# Altium PCB board.PcbDoc (part 2 of 3)
Units mil, origin at the board's own origin, x right, y up, seen from the top; angles counter-clockwise.
Board outline 2246 x 2100 mil, 2 copper layers (Top Layer, Bottom Layer); 47 components, 39 nets, 150 pads, 7 vias.
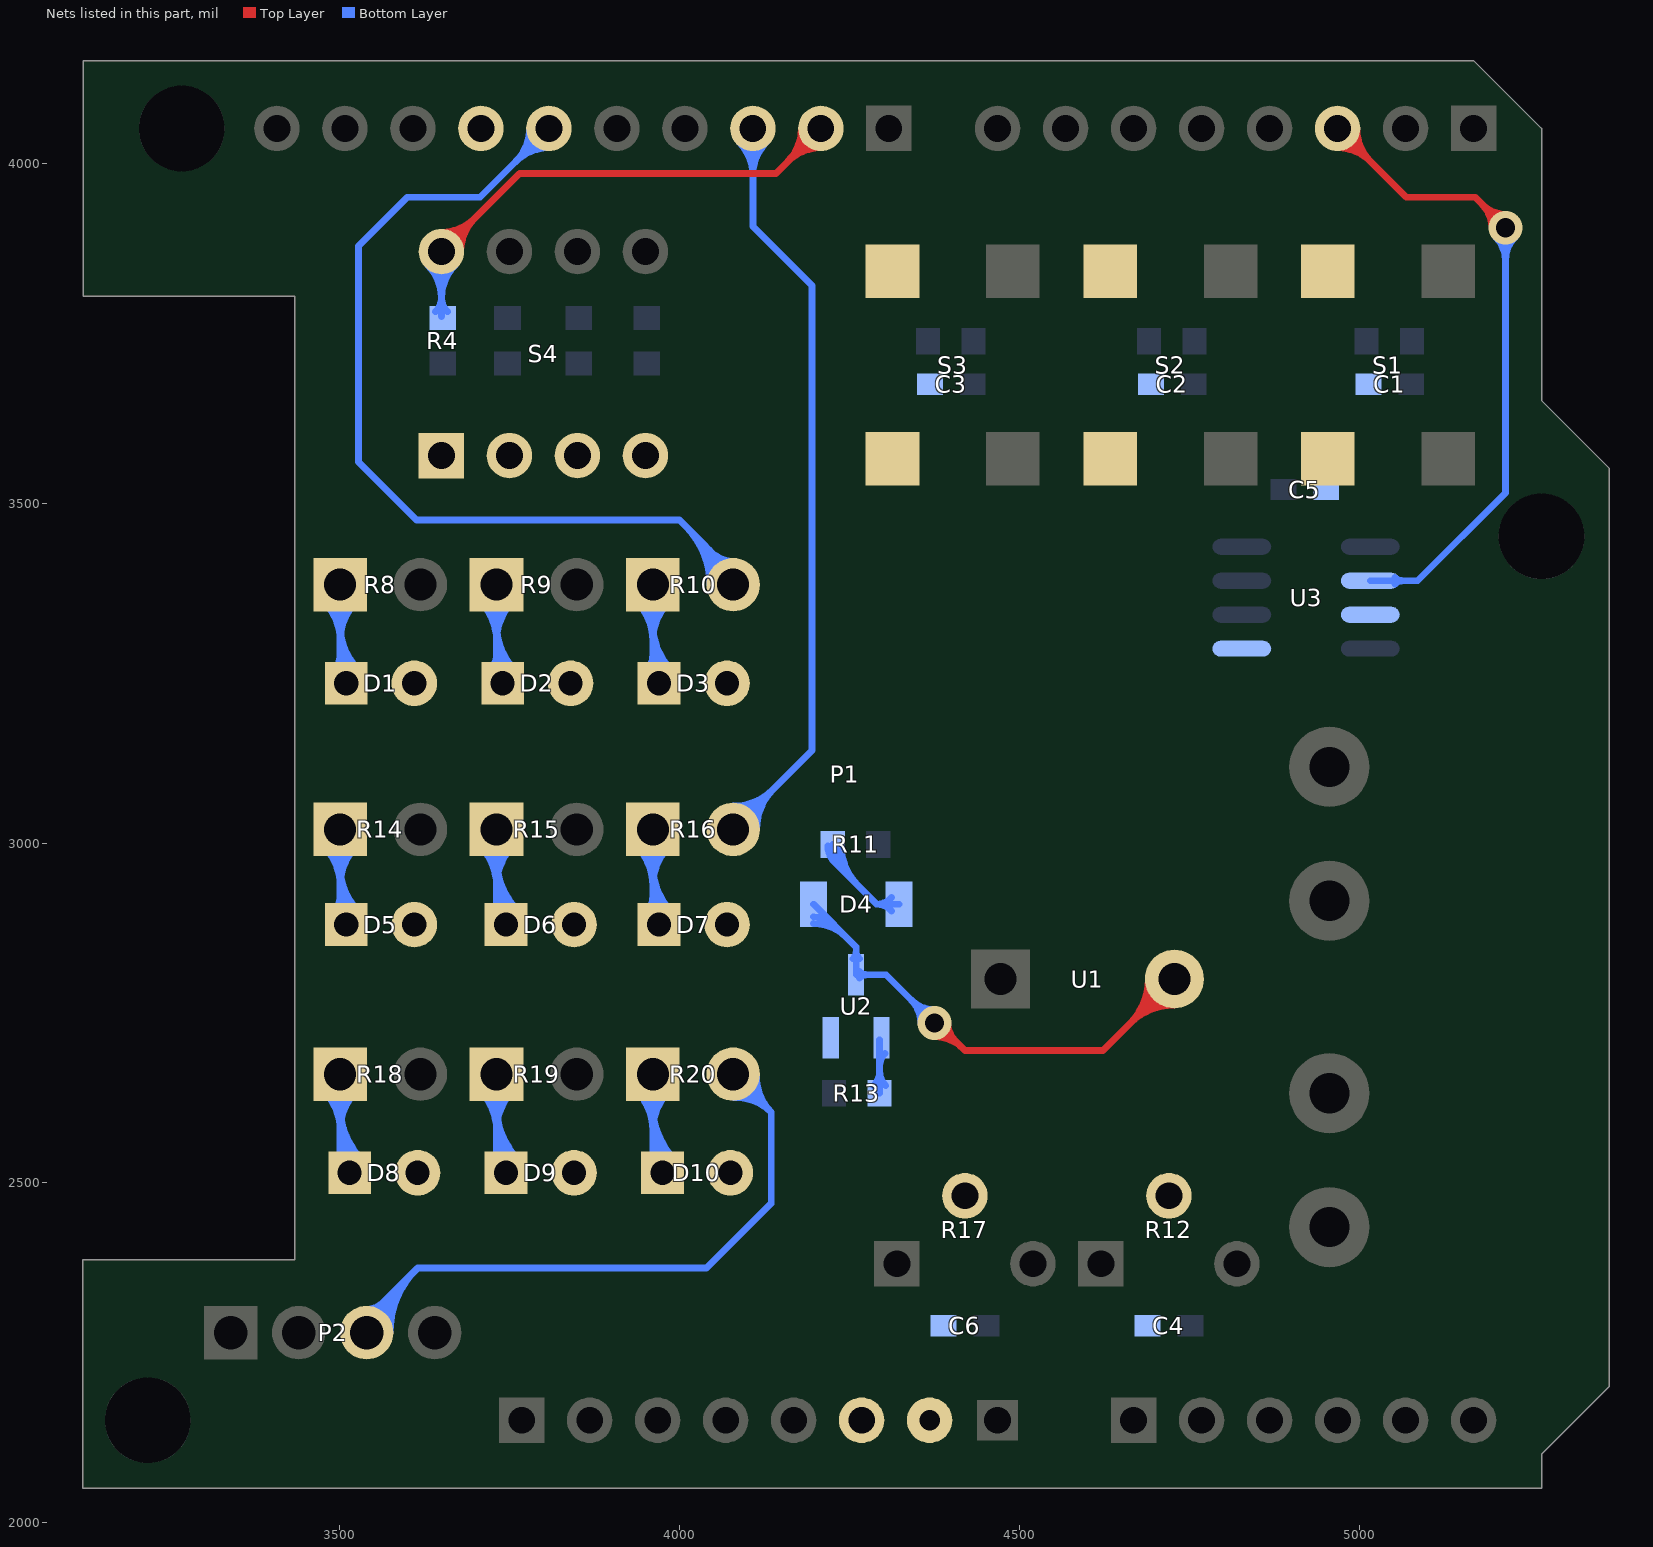
[diagram p2: the nets of this part, all layers, seen from the top]

## Via types
v1: diameter 50, hole 28, Top Layer to Bottom Layer, 7 vias

## Nets (pads, with @x,y where several pads share a name; then routed paths per layer and width w, separated by ;. In a path a pad name is that pad's centre, name@x,y a point inside that pad or via, vN(x,y) a via of type N, cw(c..) or ccw(c..) an arc to the next point about the centre after c; other vN are vias at no path point) (continued)
DIPSW4: P1.24 R4.2 S4.8 | length 3639.1
  Top Layer w10: S4.8@3650,3870 3765,3985 4142,3985 P1.24@4208,4051 ; S4.8@3650,3888.46 ccw(c3650,3933.04) 3681.52,3901.52 ; S4.8@3650,3888.46 ccw(c3650,3933.04) 3681.52,3901.52 ; S4.8@3650,3888.46 ccw(c3650,3933.04) 3681.52,3901.52 ; S4.8@3650,3888.46 ccw(c3650,3933.04) 3681.52,3901.52 ; S4.8@3650,3888.46 ccw(c3650,3933.04) 3681.52,3901.52 ; S4.8@3650,3898.46 ccw(c3650,3967.18) 3698.59,3918.59 ; S4.8@3650,3898.46 ccw(c3650,3967.18) 3698.59,3918.59 ; S4.8@3650,3898.46 ccw(c3650,3967.18) 3698.59,3918.59 ; S4.8@3650,3898.46 ccw(c3650,3967.18) 3698.59,3918.59 ; S4.8@3650,3898.46 ccw(c3650,3967.18) 3698.59,3918.59 ; S4.8@3668.46,3870 cw(c3713.04,3870) 3681.52,3901.52 ; S4.8@3668.46,3870 cw(c3713.04,3870) 3681.52,3901.52 ; S4.8@3668.46,3870 cw(c3713.04,3870) 3681.52,3901.52 ; S4.8@3668.46,3870 cw(c3713.04,3870) 3681.52,3901.52 ; S4.8@3668.46,3870 cw(c3713.04,3870) 3681.52,3901.52 ; S4.8@3678.46,3870 cw(c3747.18,3870) 3698.59,3918.59 ; S4.8@3678.46,3870 cw(c3747.18,3870) 3698.59,3918.59 ; S4.8@3678.46,3870 cw(c3747.18,3870) 3698.59,3918.59 ; S4.8@3678.46,3870 cw(c3747.18,3870) 3698.59,3918.59 ; S4.8@3678.46,3870 cw(c3747.18,3870) 3698.59,3918.59 ; 4159.41,4002.41 cw(c4208,3953.82) P1.24@4208,4022.54 ; 4159.41,4002.41 ccw(c4110.82,4051) P1.24@4179.54,4051 ; 4159.41,4002.41 cw(c4208,3953.82) P1.24@4208,4022.54 ; 4159.41,4002.41 ccw(c4110.82,4051) P1.24@4179.54,4051 ; 4159.41,4002.41 ccw(c4110.82,4051) P1.24@4179.54,4051 ; 4159.41,4002.41 cw(c4208,3953.82) P1.24@4208,4022.54 ; 4159.41,4002.41 ccw(c4110.82,4051) P1.24@4179.54,4051 ; 4159.41,4002.41 cw(c4208,3953.82) P1.24@4208,4022.54 ; 4159.41,4002.41 ccw(c4110.82,4051) P1.24@4179.54,4051 ; 4159.41,4002.41 cw(c4208,3953.82) P1.24@4208,4022.54 ; 4176.48,4019.48 cw(c4208,3987.96) P1.24@4208,4032.54 ; 4176.48,4019.48 ccw(c4144.96,4051) P1.24@4189.54,4051 ; 4176.48,4019.48 cw(c4208,3987.96) P1.24@4208,4032.54 ; 4176.48,4019.48 ccw(c4144.96,4051) P1.24@4189.54,4051 ; 4176.48,4019.48 ccw(c4144.96,4051) P1.24@4189.54,4051 ; 4176.48,4019.48 cw(c4208,3987.96) P1.24@4208,4032.54 ; 4176.48,4019.48 ccw(c4144.96,4051) P1.24@4189.54,4051 ; 4176.48,4019.48 cw(c4208,3987.96) P1.24@4208,4032.54 ; 4176.48,4019.48 ccw(c4144.96,4051) P1.24@4189.54,4051 ; 4176.48,4019.48 cw(c4208,3987.96) P1.24@4208,4032.54
  Bottom Layer w10: R4.2@3650,3774.46 S4.8@3650,3870 ; S4.8@3629.87,3849.87 cw(c3581.28,3801.28) 3650,3801.28 ; S4.8@3629.87,3849.87 cw(c3581.28,3801.28) 3650,3801.28 ; S4.8@3629.87,3849.87 cw(c3581.28,3801.28) 3650,3801.28 ; S4.8@3629.87,3849.87 cw(c3581.28,3801.28) 3650,3801.28 ; S4.8@3629.87,3849.87 cw(c3581.28,3801.28) 3650,3801.28 ; S4.8@3636.94,3856.94 cw(c3605.42,3825.42) 3650,3825.42 ; S4.8@3636.94,3856.94 cw(c3605.42,3825.42) 3650,3825.42 ; S4.8@3636.94,3856.94 cw(c3605.42,3825.42) 3650,3825.42 ; S4.8@3636.94,3856.94 cw(c3605.42,3825.42) 3650,3825.42 ; S4.8@3636.94,3856.94 cw(c3605.42,3825.42) 3650,3825.42 ; R4.2@3641.04,3781.46 ccw(c3619.41,3803.09) 3650,3803.09 ; R4.2@3641.04,3781.46 ccw(c3619.41,3803.09) 3650,3803.09 ; R4.2@3641.04,3781.46 ccw(c3619.41,3803.09) 3650,3803.09 ; R4.2@3641.04,3781.46 ccw(c3619.41,3803.09) 3650,3803.09 ; R4.2@3641.04,3781.46 ccw(c3619.41,3803.09) 3650,3803.09 ; 3650,3801.28 cw(c3718.72,3801.28) S4.8@3670.13,3849.87 ; 3650,3801.28 cw(c3718.72,3801.28) S4.8@3670.13,3849.87 ; 3650,3801.28 cw(c3718.72,3801.28) S4.8@3670.13,3849.87 ; 3650,3801.28 cw(c3718.72,3801.28) S4.8@3670.13,3849.87 ; 3650,3801.28 cw(c3718.72,3801.28) S4.8@3670.13,3849.87 ; 3650,3803.24 ccw(c3680.81,3803.24) R4.2@3659.02,3781.46 ; 3650,3803.24 ccw(c3680.81,3803.24) R4.2@3659.02,3781.46 ; 3650,3803.24 ccw(c3680.81,3803.24) R4.2@3659.02,3781.46 ; 3650,3803.24 ccw(c3680.81,3803.24) R4.2@3659.02,3781.46 ; 3650,3803.24 ccw(c3680.81,3803.24) R4.2@3659.02,3781.46 ; 3650,3825.42 cw(c3694.58,3825.42) S4.8@3663.06,3856.94 ; 3650,3825.42 cw(c3694.58,3825.42) S4.8@3663.06,3856.94 ; 3650,3825.42 cw(c3694.58,3825.42) S4.8@3663.06,3856.94 ; 3650,3825.42 cw(c3694.58,3825.42) S4.8@3663.06,3856.94 ; 3650,3825.42 cw(c3694.58,3825.42) S4.8@3663.06,3856.94
DIR_485: P1.17 U3.2 U3.3 | length 2727.2
  Top Layer w10: P1.17@4968,4051 5069,3950 5170,3950 v1(5215,3905) ; P1.17@4968,4022.54 cw(c4968,3953.82) 5016.59,4002.41 ; P1.17@4968,4022.54 cw(c4968,3953.82) 5016.59,4002.41 ; P1.17@4968,4022.54 cw(c4968,3953.82) 5016.59,4002.41 ; P1.17@4968,4022.54 cw(c4968,3953.82) 5016.59,4002.41 ; P1.17@4968,4022.54 cw(c4968,3953.82) 5016.59,4002.41 ; P1.17@4968,4032.54 cw(c4968,3987.96) 4999.52,4019.48 ; P1.17@4968,4032.54 cw(c4968,3987.96) 4999.52,4019.48 ; P1.17@4968,4032.54 cw(c4968,3987.96) 4999.52,4019.48 ; P1.17@4968,4032.54 cw(c4968,3987.96) 4999.52,4019.48 ; P1.17@4968,4032.54 cw(c4968,3987.96) 4999.52,4019.48 ; P1.17@4986.46,4051 ccw(c5031.04,4051) 4999.52,4019.48 ; P1.17@4986.46,4051 ccw(c5031.04,4051) 4999.52,4019.48 ; P1.17@4986.46,4051 ccw(c5031.04,4051) 4999.52,4019.48 ; P1.17@4986.46,4051 ccw(c5031.04,4051) 4999.52,4019.48 ; P1.17@4986.46,4051 ccw(c5031.04,4051) 4999.52,4019.48 ; P1.17@4996.46,4051 ccw(c5065.18,4051) 5016.59,4002.41 ; P1.17@4996.46,4051 ccw(c5065.18,4051) 5016.59,4002.41 ; P1.17@4996.46,4051 ccw(c5065.18,4051) 5016.59,4002.41 ; P1.17@4996.46,4051 ccw(c5065.18,4051) 5016.59,4002.41 ; P1.17@4996.46,4051 ccw(c5065.18,4051) 5016.59,4002.41 ; 5180.86,3939.14 cw(c5146.72,3905) v1@5195,3905 ; 5180.86,3939.14 ccw(c5215,3973.28) v1@5215,3925 ; 5180.86,3939.14 cw(c5146.72,3905) v1@5195,3905 ; 5180.86,3939.14 ccw(c5215,3973.28) v1@5215,3925 ; 5180.86,3939.14 ccw(c5215,3973.28) v1@5215,3925 ; 5180.86,3939.14 cw(c5146.72,3905) v1@5195,3905 ; 5180.86,3939.14 ccw(c5215,3973.28) v1@5215,3925 ; 5180.86,3939.14 cw(c5146.72,3905) v1@5195,3905 ; 5180.86,3939.14 ccw(c5215,3973.28) v1@5215,3925 ; 5180.86,3939.14 cw(c5146.72,3905) v1@5195,3905
  Bottom Layer w10: U3.2@5016.19,3385.81 5085.81,3385.81 5215,3515 v1(5215,3905) ; U3.2@5052.51,3381 cw(c5064.13,3369.37) 5064.13,3385.81 ; U3.2@5052.51,3381 cw(c5064.13,3369.37) 5064.13,3385.81 ; U3.2@5052.51,3381 cw(c5064.13,3369.37) 5064.13,3385.81 ; U3.2@5052.51,3381 cw(c5064.13,3369.37) 5064.13,3385.81 ; U3.2@5052.51,3381 cw(c5064.13,3369.37) 5064.13,3385.81 ; U3.2@5052.51,3390.63 ccw(c5064.13,3402.26) 5064.13,3385.81 ; U3.2@5052.51,3390.63 ccw(c5064.13,3402.26) 5064.13,3385.81 ; U3.2@5052.51,3390.63 ccw(c5064.13,3402.26) 5064.13,3385.81 ; U3.2@5052.51,3390.63 ccw(c5064.13,3402.26) 5064.13,3385.81 ; U3.2@5052.51,3390.63 ccw(c5064.13,3402.26) 5064.13,3385.81 ; v1@5200.86,3890.86 cw(c5166.72,3856.72) 5215,3856.72 ; v1@5200.86,3890.86 cw(c5166.72,3856.72) 5215,3856.72 ; v1@5200.86,3890.86 cw(c5166.72,3856.72) 5215,3856.72 ; v1@5200.86,3890.86 cw(c5166.72,3856.72) 5215,3856.72 ; v1@5200.86,3890.86 cw(c5166.72,3856.72) 5215,3856.72 ; 5215,3856.72 cw(c5263.28,3856.72) v1@5229.14,3890.86 ; 5215,3856.72 cw(c5263.28,3856.72) v1@5229.14,3890.86 ; 5215,3856.72 cw(c5263.28,3856.72) v1@5229.14,3890.86 ; 5215,3856.72 cw(c5263.28,3856.72) v1@5229.14,3890.86 ; 5215,3856.72 cw(c5263.28,3856.72) v1@5229.14,3890.86
GND: C1.1 C2.1 C3.1 C4.1 C5.1 C6.1 D1.2 D2.2 D3.2 D5.2 D6.2 D7.2 D8.2 D9.2 D10.2 P1.6 P1.7 P1.29 R12.2 R17.2 S1.1 S1.2 S2.1 S2.2 S3.1 S3.2 S4.1 S4.2 S4.3 S4.4 U2.2 U3.5
GREEN1: P1.28 R10.2 | length 3708.2
  Bottom Layer w10: P1.28@3808,4051 3707,3950 3600,3950 3528,3878 3528,3560.28 3613.28,3475 4000,3475 4079.06,3395.94 R10.2@4079.06,3380 ; 3759.41,4002.41 cw(c3808,3953.82) P1.28@3808,4022.54 ; 3759.41,4002.41 ccw(c3710.82,4051) P1.28@3779.54,4051 ; 3759.41,4002.41 cw(c3808,3953.82) P1.28@3808,4022.54 ; 3759.41,4002.41 ccw(c3710.82,4051) P1.28@3779.54,4051 ; 3759.41,4002.41 ccw(c3710.82,4051) P1.28@3779.54,4051 ; 3759.41,4002.41 cw(c3808,3953.82) P1.28@3808,4022.54 ; 3759.41,4002.41 ccw(c3710.82,4051) P1.28@3779.54,4051 ; 3759.41,4002.41 cw(c3808,3953.82) P1.28@3808,4022.54 ; 3759.41,4002.41 ccw(c3710.82,4051) P1.28@3779.54,4051 ; 3759.41,4002.41 cw(c3808,3953.82) P1.28@3808,4022.54 ; 3776.48,4019.48 cw(c3808,3987.96) P1.28@3808,4032.54 ; 3776.48,4019.48 ccw(c3744.96,4051) P1.28@3789.54,4051 ; 3776.48,4019.48 cw(c3808,3987.96) P1.28@3808,4032.54 ; 3776.48,4019.48 ccw(c3744.96,4051) P1.28@3789.54,4051 ; 3776.48,4019.48 ccw(c3744.96,4051) P1.28@3789.54,4051 ; 3776.48,4019.48 cw(c3808,3987.96) P1.28@3808,4032.54 ; 3776.48,4019.48 ccw(c3744.96,4051) P1.28@3789.54,4051 ; 3776.48,4019.48 cw(c3808,3987.96) P1.28@3808,4032.54 ; 3776.48,4019.48 ccw(c3744.96,4051) P1.28@3789.54,4051 ; 3776.48,4019.48 cw(c3808,3987.96) P1.28@3808,4032.54 ; 4009.11,3465.89 cw(c3923.21,3380) R10.2@4044.68,3380 ; 4009.11,3465.89 cw(c3923.21,3380) R10.2@4044.68,3380 ; 4009.11,3465.89 cw(c3923.21,3380) R10.2@4044.68,3380 ; 4009.11,3465.89 cw(c3923.21,3380) R10.2@4044.68,3380 ; 4009.11,3465.89 cw(c3923.21,3380) R10.2@4044.68,3380 ; 4026.18,3448.82 cw(c3957.36,3380) R10.2@4054.69,3380 ; 4026.18,3448.82 cw(c3957.36,3380) R10.2@4054.69,3380 ; 4026.18,3448.82 cw(c3957.36,3380) R10.2@4054.69,3380 ; 4026.18,3448.82 cw(c3957.36,3380) R10.2@4054.69,3380 ; 4026.18,3448.82 cw(c3957.36,3380) R10.2@4054.69,3380 ; 4043.25,3431.75 cw(c3991.5,3380) R10.2@4064.68,3380 ; 4043.25,3431.75 cw(c3991.5,3380) R10.2@4064.68,3380 ; 4043.25,3431.75 cw(c3991.5,3380) R10.2@4064.68,3380 ; 4043.25,3431.75 cw(c3991.5,3380) R10.2@4064.68,3380 ; 4043.25,3431.75 cw(c3991.5,3380) R10.2@4064.68,3380 ; 4047.6,3427.4 ccw(c4079.06,3458.85) R10.2@4079.06,3414.37 ; 4047.6,3427.4 ccw(c4079.06,3458.85) R10.2@4079.06,3414.37 ; 4047.6,3427.4 ccw(c4079.06,3458.85) R10.2@4079.06,3414.37 ; 4047.6,3427.4 ccw(c4079.06,3458.85) R10.2@4079.06,3414.37 ; 4047.6,3427.4 ccw(c4079.06,3458.85) R10.2@4079.06,3414.37 ; 4060.32,3414.68 cw(c4025.64,3380) R10.2@4074.68,3380 ; 4060.32,3414.68 cw(c4025.64,3380) R10.2@4074.68,3380 ; 4060.32,3414.68 cw(c4025.64,3380) R10.2@4074.68,3380 ; 4060.32,3414.68 cw(c4025.64,3380) R10.2@4074.68,3380 ; 4060.32,3414.68 cw(c4025.64,3380) R10.2@4074.68,3380
GREEN2: P1.25 R16.2 | length 3118.7
  Bottom Layer w10: R16.2@4079.06,3020 4195,3135.94 4195,3820 4108,3907 P1.25@4108,4051 ; R16.2@4079.06,3044.37 ccw(c4079.06,3103.2) 4120.66,3061.6 ; R16.2@4079.06,3044.37 ccw(c4079.06,3103.2) 4120.66,3061.6 ; R16.2@4079.06,3044.37 ccw(c4079.06,3103.2) 4120.66,3061.6 ; R16.2@4079.06,3044.37 ccw(c4079.06,3103.2) 4120.66,3061.6 ; R16.2@4079.06,3044.37 ccw(c4079.06,3103.2) 4120.66,3061.6 ; R16.2@4079.06,3054.37 ccw(c4079.06,3137.35) 4137.73,3078.67 ; R16.2@4079.06,3054.37 ccw(c4079.06,3137.35) 4137.73,3078.67 ; R16.2@4079.06,3054.37 ccw(c4079.06,3137.35) 4137.73,3078.67 ; R16.2@4079.06,3054.37 ccw(c4079.06,3137.35) 4137.73,3078.67 ; R16.2@4079.06,3054.37 ccw(c4079.06,3137.35) 4137.73,3078.67 ; P1.25@4087.87,4030.87 cw(c4039.28,3982.28) 4108,3982.28 ; P1.25@4087.87,4030.87 cw(c4039.28,3982.28) 4108,3982.28 ; P1.25@4087.87,4030.87 cw(c4039.28,3982.28) 4108,3982.28 ; P1.25@4087.87,4030.87 cw(c4039.28,3982.28) 4108,3982.28 ; P1.25@4087.87,4030.87 cw(c4039.28,3982.28) 4108,3982.28 ; P1.25@4094.94,4037.94 cw(c4063.42,4006.42) 4108,4006.42 ; P1.25@4094.94,4037.94 cw(c4063.42,4006.42) 4108,4006.42 ; P1.25@4094.94,4037.94 cw(c4063.42,4006.42) 4108,4006.42 ; P1.25@4094.94,4037.94 cw(c4063.42,4006.42) 4108,4006.42 ; P1.25@4094.94,4037.94 cw(c4063.42,4006.42) 4108,4006.42 ; R16.2@4103.43,3020 cw(c4162.26,3020) 4120.66,3061.6 ; R16.2@4103.43,3020 cw(c4162.26,3020) 4120.66,3061.6 ; R16.2@4103.43,3020 cw(c4162.26,3020) 4120.66,3061.6 ; R16.2@4103.43,3020 cw(c4162.26,3020) 4120.66,3061.6 ; R16.2@4103.43,3020 cw(c4162.26,3020) 4120.66,3061.6 ; 4108,3982.28 cw(c4176.72,3982.28) P1.25@4128.13,4030.87 ; 4108,3982.28 cw(c4176.72,3982.28) P1.25@4128.13,4030.87 ; 4108,3982.28 cw(c4176.72,3982.28) P1.25@4128.13,4030.87 ; 4108,3982.28 cw(c4176.72,3982.28) P1.25@4128.13,4030.87 ; 4108,3982.28 cw(c4176.72,3982.28) P1.25@4128.13,4030.87 ; 4108,4006.42 cw(c4152.58,4006.42) P1.25@4121.06,4037.94 ; 4108,4006.42 cw(c4152.58,4006.42) P1.25@4121.06,4037.94 ; 4108,4006.42 cw(c4152.58,4006.42) P1.25@4121.06,4037.94 ; 4108,4006.42 cw(c4152.58,4006.42) P1.25@4121.06,4037.94 ; 4108,4006.42 cw(c4152.58,4006.42) P1.25@4121.06,4037.94 ; R16.2@4113.43,3020 cw(c4196.4,3020) 4137.73,3078.67 ; R16.2@4113.43,3020 cw(c4196.4,3020) 4137.73,3078.67 ; R16.2@4113.43,3020 cw(c4196.4,3020) 4137.73,3078.67 ; R16.2@4113.43,3020 cw(c4196.4,3020) 4137.73,3078.67 ; R16.2@4113.43,3020 cw(c4196.4,3020) 4137.73,3078.67
GREEN3: P2.3 R20.2 | length 3562.6
  Bottom Layer w10: P2.3@3540,2280 3540,2300 3615,2375 4040,2375 4135,2470 4135,2604.06 ; R20.2@4079.06,2660 4135,2604.06 ; P2.3@3540,2314.37 ccw(c3540,2349.06) 3564.53,2324.53 ; P2.3@3540,2314.37 ccw(c3540,2349.06) 3564.53,2324.53 ; P2.3@3540,2314.37 ccw(c3540,2349.06) 3564.53,2324.53 ; P2.3@3540,2314.37 ccw(c3540,2349.06) 3564.53,2324.53 ; P2.3@3540,2314.37 ccw(c3540,2349.06) 3564.53,2324.53 ; P2.3@3544.37,2280 cw(c3603.2,2280) 3561.6,2321.6 ; P2.3@3544.37,2280 cw(c3603.2,2280) 3561.6,2321.6 ; P2.3@3544.37,2280 cw(c3603.2,2280) 3561.6,2321.6 ; P2.3@3544.37,2280 cw(c3603.2,2280) 3561.6,2321.6 ; P2.3@3544.37,2280 cw(c3603.2,2280) 3561.6,2321.6 ; P2.3@3554.37,2280 cw(c3637.35,2280) 3578.67,2338.67 ; P2.3@3554.37,2280 cw(c3637.35,2280) 3578.67,2338.67 ; P2.3@3554.37,2280 cw(c3637.35,2280) 3578.67,2338.67 ; P2.3@3554.37,2280 cw(c3637.35,2280) 3578.67,2338.67 ; P2.3@3554.37,2280 cw(c3637.35,2280) 3578.67,2338.67 ; P2.3@3564.37,2280 cw(c3671.49,2280) 3595.74,2355.74 ; P2.3@3564.37,2280 cw(c3671.49,2280) 3595.74,2355.74 ; P2.3@3564.37,2280 cw(c3671.49,2280) 3595.74,2355.74 ; P2.3@3564.37,2280 cw(c3671.49,2280) 3595.74,2355.74 ; P2.3@3564.37,2280 cw(c3671.49,2280) 3595.74,2355.74 ; P2.3@3574.37,2280 cw(c3705.63,2280) 3612.82,2372.82 ; P2.3@3574.37,2280 cw(c3705.63,2280) 3612.82,2372.82 ; P2.3@3574.37,2280 cw(c3705.63,2280) 3612.82,2372.82 ; P2.3@3574.37,2280 cw(c3705.63,2280) 3612.82,2372.82 ; P2.3@3574.37,2280 cw(c3705.63,2280) 3612.82,2372.82 ; R20.2@4079.89,2635.64 cw(c4081.69,2583.3) 4118.72,2620.33 ; R20.2@4079.89,2635.64 cw(c4081.69,2583.3) 4118.72,2620.33 ; R20.2@4079.89,2635.64 cw(c4081.69,2583.3) 4118.72,2620.33 ; R20.2@4079.89,2635.64 cw(c4081.69,2583.3) 4118.72,2620.33 ; R20.2@4079.89,2635.64 cw(c4081.69,2583.3) 4118.72,2620.33 ; R20.2@4080.23,2625.65 cw(c4082.76,2551.83) 4135,2604.06 ; R20.2@4080.23,2625.65 cw(c4082.76,2551.83) 4135,2604.06 ; R20.2@4080.23,2625.65 cw(c4082.76,2551.83) 4135,2604.06 ; R20.2@4080.23,2625.65 cw(c4082.76,2551.83) 4135,2604.06 ; R20.2@4080.23,2625.65 cw(c4082.76,2551.83) 4135,2604.06 ; R20.2@4103.41,2659.16 ccw(c4155.76,2657.37) 4118.72,2620.33 ; R20.2@4103.41,2659.16 ccw(c4155.76,2657.37) 4118.72,2620.33 ; R20.2@4103.41,2659.16 ccw(c4155.76,2657.37) 4118.72,2620.33 ; R20.2@4103.41,2659.16 ccw(c4155.76,2657.37) 4118.72,2620.33 ; R20.2@4103.41,2659.16 ccw(c4155.76,2657.37) 4118.72,2620.33 ; R20.2@4113.4,2658.82 ccw(c4187.23,2656.29) 4135,2604.06 ; R20.2@4113.4,2658.82 ccw(c4187.23,2656.29) 4135,2604.06 ; R20.2@4113.4,2658.82 ccw(c4187.23,2656.29) 4135,2604.06 ; R20.2@4113.4,2658.82 ccw(c4187.23,2656.29) 4135,2604.06 ; R20.2@4113.4,2658.82 ccw(c4187.23,2656.29) 4135,2604.06
NetD1_1: D1.1 R8.1 | length 2212.9
  Bottom Layer w10: D1.1@3500.94,3244.06 R8.1@3500.94,3380 ; R8.1@3476.64,3355.7 cw(c3417.97,3297.02) 3500.94,3297.02 ; R8.1@3476.64,3355.7 cw(c3417.97,3297.02) 3500.94,3297.02 ; R8.1@3476.64,3355.7 cw(c3417.97,3297.02) 3500.94,3297.02 ; R8.1@3476.64,3355.7 cw(c3417.97,3297.02) 3500.94,3297.02 ; R8.1@3476.64,3355.7 cw(c3417.97,3297.02) 3500.94,3297.02 ; R8.1@3483.71,3362.77 cw(c3442.11,3321.17) 3500.94,3321.17 ; R8.1@3483.71,3362.77 cw(c3442.11,3321.17) 3500.94,3321.17 ; R8.1@3483.71,3362.77 cw(c3442.11,3321.17) 3500.94,3321.17 ; R8.1@3483.71,3362.77 cw(c3442.11,3321.17) 3500.94,3321.17 ; R8.1@3483.71,3362.77 cw(c3442.11,3321.17) 3500.94,3321.17 ; D1.1@3491.26,3253.74 ccw(c3467.89,3277.11) 3500.94,3277.11 ; D1.1@3491.26,3253.74 ccw(c3467.89,3277.11) 3500.94,3277.11 ; D1.1@3491.26,3253.74 ccw(c3467.89,3277.11) 3500.94,3277.11 ; D1.1@3491.26,3253.74 ccw(c3467.89,3277.11) 3500.94,3277.11 ; D1.1@3491.26,3253.74 ccw(c3467.89,3277.11) 3500.94,3277.11 ; 3500.94,3272.54 ccw(c3547.54,3272.54) D1.1@3514.59,3239.59 ; 3500.94,3272.54 ccw(c3547.54,3272.54) D1.1@3514.59,3239.59 ; 3500.94,3272.54 ccw(c3547.54,3272.54) D1.1@3514.59,3239.59 ; 3500.94,3272.54 ccw(c3547.54,3272.54) D1.1@3514.59,3239.59 ; 3500.94,3272.54 ccw(c3547.54,3272.54) D1.1@3514.59,3239.59 ; 3500.94,3296.69 ccw(c3571.69,3296.69) D1.1@3521.66,3246.66 ; 3500.94,3296.69 ccw(c3571.69,3296.69) D1.1@3521.66,3246.66 ; 3500.94,3296.69 ccw(c3571.69,3296.69) D1.1@3521.66,3246.66 ; 3500.94,3296.69 ccw(c3571.69,3296.69) D1.1@3521.66,3246.66 ; 3500.94,3296.69 ccw(c3571.69,3296.69) D1.1@3521.66,3246.66 ; 3500.94,3297.02 cw(c3583.92,3297.02) R8.1@3525.25,3355.7 ; 3500.94,3297.02 cw(c3583.92,3297.02) R8.1@3525.25,3355.7 ; 3500.94,3297.02 cw(c3583.92,3297.02) R8.1@3525.25,3355.7 ; 3500.94,3297.02 cw(c3583.92,3297.02) R8.1@3525.25,3355.7 ; 3500.94,3297.02 cw(c3583.92,3297.02) R8.1@3525.25,3355.7 ; 3500.94,3320.83 ccw(c3595.83,3320.83) D1.1@3528.74,3253.74 ; 3500.94,3320.83 ccw(c3595.83,3320.83) D1.1@3528.74,3253.74 ; 3500.94,3320.83 ccw(c3595.83,3320.83) D1.1@3528.74,3253.74 ; 3500.94,3320.83 ccw(c3595.83,3320.83) D1.1@3528.74,3253.74 ; 3500.94,3320.83 ccw(c3595.83,3320.83) D1.1@3528.74,3253.74 ; 3500.94,3321.17 cw(c3559.78,3321.17) R8.1@3518.18,3362.77 ; 3500.94,3321.17 cw(c3559.78,3321.17) R8.1@3518.18,3362.77 ; 3500.94,3321.17 cw(c3559.78,3321.17) R8.1@3518.18,3362.77 ; 3500.94,3321.17 cw(c3559.78,3321.17) R8.1@3518.18,3362.77 ; 3500.94,3321.17 cw(c3559.78,3321.17) R8.1@3518.18,3362.77
NetD2_1: D2.1 R9.1 | length 2212.9
  Bottom Layer w10: D2.1@3730.94,3244.06 R9.1@3730.94,3380 ; R9.1@3706.64,3355.7 cw(c3647.97,3297.02) 3730.94,3297.02 ; R9.1@3706.64,3355.7 cw(c3647.97,3297.02) 3730.94,3297.02 ; R9.1@3706.64,3355.7 cw(c3647.97,3297.02) 3730.94,3297.02 ; R9.1@3706.64,3355.7 cw(c3647.97,3297.02) 3730.94,3297.02 ; R9.1@3706.64,3355.7 cw(c3647.97,3297.02) 3730.94,3297.02 ; R9.1@3713.71,3362.77 cw(c3672.11,3321.17) 3730.94,3321.17 ; R9.1@3713.71,3362.77 cw(c3672.11,3321.17) 3730.94,3321.17 ; R9.1@3713.71,3362.77 cw(c3672.11,3321.17) 3730.94,3321.17 ; R9.1@3713.71,3362.77 cw(c3672.11,3321.17) 3730.94,3321.17 ; R9.1@3713.71,3362.77 cw(c3672.11,3321.17) 3730.94,3321.17 ; D2.1@3721.26,3253.74 ccw(c3697.89,3277.11) 3730.94,3277.11 ; D2.1@3721.26,3253.74 ccw(c3697.89,3277.11) 3730.94,3277.11 ; D2.1@3721.26,3253.74 ccw(c3697.89,3277.11) 3730.94,3277.11 ; D2.1@3721.26,3253.74 ccw(c3697.89,3277.11) 3730.94,3277.11 ; D2.1@3721.26,3253.74 ccw(c3697.89,3277.11) 3730.94,3277.11 ; 3730.94,3272.54 ccw(c3777.54,3272.54) D2.1@3744.59,3239.59 ; 3730.94,3272.54 ccw(c3777.54,3272.54) D2.1@3744.59,3239.59 ; 3730.94,3272.54 ccw(c3777.54,3272.54) D2.1@3744.59,3239.59 ; 3730.94,3272.54 ccw(c3777.54,3272.54) D2.1@3744.59,3239.59 ; 3730.94,3272.54 ccw(c3777.54,3272.54) D2.1@3744.59,3239.59 ; 3730.94,3296.69 ccw(c3801.69,3296.69) D2.1@3751.66,3246.66 ; 3730.94,3296.69 ccw(c3801.69,3296.69) D2.1@3751.66,3246.66 ; 3730.94,3296.69 ccw(c3801.69,3296.69) D2.1@3751.66,3246.66 ; 3730.94,3296.69 ccw(c3801.69,3296.69) D2.1@3751.66,3246.66 ; 3730.94,3296.69 ccw(c3801.69,3296.69) D2.1@3751.66,3246.66 ; 3730.94,3297.02 cw(c3813.92,3297.02) R9.1@3755.25,3355.7 ; 3730.94,3297.02 cw(c3813.92,3297.02) R9.1@3755.25,3355.7 ; 3730.94,3297.02 cw(c3813.92,3297.02) R9.1@3755.25,3355.7 ; 3730.94,3297.02 cw(c3813.92,3297.02) R9.1@3755.25,3355.7 ; 3730.94,3297.02 cw(c3813.92,3297.02) R9.1@3755.25,3355.7 ; 3730.94,3320.83 ccw(c3825.83,3320.83) D2.1@3758.74,3253.74 ; 3730.94,3320.83 ccw(c3825.83,3320.83) D2.1@3758.74,3253.74 ; 3730.94,3320.83 ccw(c3825.83,3320.83) D2.1@3758.74,3253.74 ; 3730.94,3320.83 ccw(c3825.83,3320.83) D2.1@3758.74,3253.74 ; 3730.94,3320.83 ccw(c3825.83,3320.83) D2.1@3758.74,3253.74 ; 3730.94,3321.17 cw(c3789.78,3321.17) R9.1@3748.18,3362.77 ; 3730.94,3321.17 cw(c3789.78,3321.17) R9.1@3748.18,3362.77 ; 3730.94,3321.17 cw(c3789.78,3321.17) R9.1@3748.18,3362.77 ; 3730.94,3321.17 cw(c3789.78,3321.17) R9.1@3748.18,3362.77 ; 3730.94,3321.17 cw(c3789.78,3321.17) R9.1@3748.18,3362.77
NetD3_1: D3.1 R10.1 | length 2212.9
  Bottom Layer w10: D3.1@3960.94,3244.06 R10.1@3960.94,3380 ; R10.1@3936.64,3355.7 cw(c3877.97,3297.02) 3960.94,3297.02 ; R10.1@3936.64,3355.7 cw(c3877.97,3297.02) 3960.94,3297.02 ; R10.1@3936.64,3355.7 cw(c3877.97,3297.02) 3960.94,3297.02 ; R10.1@3936.64,3355.7 cw(c3877.97,3297.02) 3960.94,3297.02 ; R10.1@3936.64,3355.7 cw(c3877.97,3297.02) 3960.94,3297.02 ; R10.1@3943.71,3362.77 cw(c3902.11,3321.17) 3960.94,3321.17 ; R10.1@3943.71,3362.77 cw(c3902.11,3321.17) 3960.94,3321.17 ; R10.1@3943.71,3362.77 cw(c3902.11,3321.17) 3960.94,3321.17 ; R10.1@3943.71,3362.77 cw(c3902.11,3321.17) 3960.94,3321.17 ; R10.1@3943.71,3362.77 cw(c3902.11,3321.17) 3960.94,3321.17 ; D3.1@3951.26,3253.74 ccw(c3927.89,3277.11) 3960.94,3277.11 ; D3.1@3951.26,3253.74 ccw(c3927.89,3277.11) 3960.94,3277.11 ; D3.1@3951.26,3253.74 ccw(c3927.89,3277.11) 3960.94,3277.11 ; D3.1@3951.26,3253.74 ccw(c3927.89,3277.11) 3960.94,3277.11 ; D3.1@3951.26,3253.74 ccw(c3927.89,3277.11) 3960.94,3277.11 ; 3960.94,3272.54 ccw(c4007.54,3272.54) D3.1@3974.59,3239.59 ; 3960.94,3272.54 ccw(c4007.54,3272.54) D3.1@3974.59,3239.59 ; 3960.94,3272.54 ccw(c4007.54,3272.54) D3.1@3974.59,3239.59 ; 3960.94,3272.54 ccw(c4007.54,3272.54) D3.1@3974.59,3239.59 ; 3960.94,3272.54 ccw(c4007.54,3272.54) D3.1@3974.59,3239.59 ; 3960.94,3296.69 ccw(c4031.69,3296.69) D3.1@3981.66,3246.66 ; 3960.94,3296.69 ccw(c4031.69,3296.69) D3.1@3981.66,3246.66 ; 3960.94,3296.69 ccw(c4031.69,3296.69) D3.1@3981.66,3246.66 ; 3960.94,3296.69 ccw(c4031.69,3296.69) D3.1@3981.66,3246.66 ; 3960.94,3296.69 ccw(c4031.69,3296.69) D3.1@3981.66,3246.66 ; 3960.94,3297.02 cw(c4043.92,3297.02) R10.1@3985.25,3355.7 ; 3960.94,3297.02 cw(c4043.92,3297.02) R10.1@3985.25,3355.7 ; 3960.94,3297.02 cw(c4043.92,3297.02) R10.1@3985.25,3355.7 ; 3960.94,3297.02 cw(c4043.92,3297.02) R10.1@3985.25,3355.7 ; 3960.94,3297.02 cw(c4043.92,3297.02) R10.1@3985.25,3355.7 ; 3960.94,3320.83 ccw(c4055.83,3320.83) D3.1@3988.74,3253.74 ; 3960.94,3320.83 ccw(c4055.83,3320.83) D3.1@3988.74,3253.74 ; 3960.94,3320.83 ccw(c4055.83,3320.83) D3.1@3988.74,3253.74 ; 3960.94,3320.83 ccw(c4055.83,3320.83) D3.1@3988.74,3253.74 ; 3960.94,3320.83 ccw(c4055.83,3320.83) D3.1@3988.74,3253.74 ; 3960.94,3321.17 cw(c4019.78,3321.17) R10.1@3978.18,3362.77 ; 3960.94,3321.17 cw(c4019.78,3321.17) R10.1@3978.18,3362.77 ; 3960.94,3321.17 cw(c4019.78,3321.17) R10.1@3978.18,3362.77 ; 3960.94,3321.17 cw(c4019.78,3321.17) R10.1@3978.18,3362.77 ; 3960.94,3321.17 cw(c4019.78,3321.17) R10.1@3978.18,3362.77
NetD4_1: D4.1 U1.2 U2.3 | length 2845.4
  Top Layer w10: v1(4375,2735) 4380,2735 4420,2695 4622.95,2695 U1.2@4727.95,2800 ; v1@4375,2715 cw(c4375,2654.64) 4417.68,2697.32 ; v1@4375,2715 cw(c4375,2654.64) 4417.68,2697.32 ; v1@4375,2715 cw(c4375,2654.64) 4417.68,2697.32 ; v1@4375,2725 cw(c4375,2688.79) 4400.61,2714.39 ; v1@4375,2725 cw(c4375,2688.79) 4400.61,2714.39 ; v1@4375,2725 cw(c4375,2688.79) 4400.61,2714.39 ; v1@4395,2735 ccw(c4431.21,2735) 4405.61,2709.39 ; v1@4395,2735 ccw(c4431.21,2735) 4405.61,2709.39 ; v1@4395,2735 ccw(c4431.21,2735) 4405.61,2709.39 ; 4662.56,2734.61 cw(c4727.95,2669.21) U1.2@4727.95,2761.69 ; 4662.56,2734.61 ccw(c4597.16,2800) U1.2@4689.65,2800 ; 4662.56,2734.61 cw(c4727.95,2669.21) U1.2@4727.95,2761.69 ; 4662.56,2734.61 ccw(c4597.16,2800) U1.2@4689.65,2800 ; 4662.56,2734.61 ccw(c4597.16,2800) U1.2@4689.65,2800 ; 4662.56,2734.61 cw(c4727.95,2669.21) U1.2@4727.95,2761.69 ; 4679.63,2751.68 cw(c4727.95,2703.35) U1.2@4727.95,2771.69 ; 4679.63,2751.68 ccw(c4631.31,2800) U1.2@4699.65,2800 ; 4679.63,2751.68 cw(c4727.95,2703.35) U1.2@4727.95,2771.69 ; 4679.63,2751.68 ccw(c4631.31,2800) U1.2@4699.65,2800 ; 4679.63,2751.68 ccw(c4631.31,2800) U1.2@4699.65,2800 ; 4679.63,2751.68 cw(c4727.95,2703.35) U1.2@4727.95,2771.69 ; 4696.7,2768.75 cw(c4727.95,2737.5) U1.2@4727.95,2781.69 ; 4696.7,2768.75 ccw(c4665.45,2800) U1.2@4709.65,2800 ; 4696.7,2768.75 cw(c4727.95,2737.5) U1.2@4727.95,2781.69 ; 4696.7,2768.75 ccw(c4665.45,2800) U1.2@4709.65,2800 ; 4696.7,2768.75 ccw(c4665.45,2800) U1.2@4709.65,2800 ; 4696.7,2768.75 cw(c4727.95,2737.5) U1.2@4727.95,2781.69
  Bottom Layer w10: D4.1@4197.01,2910 4260,2847.01 U2.3@4260,2806.26 4303.74,2806.26 v1(4375,2735) ; D4.1@4197.01,2881.54 cw(c4197.01,2812.82) 4245.6,2861.41 ; D4.1@4197.01,2881.54 cw(c4197.01,2812.82) 4245.6,2861.41 ; D4.1@4197.01,2881.54 cw(c4197.01,2812.82) 4245.6,2861.41 ; D4.1@4197.01,2881.54 cw(c4197.01,2812.82) 4245.6,2861.41 ; D4.1@4197.01,2881.54 cw(c4197.01,2812.82) 4245.6,2861.41 ; D4.1@4197.01,2891.54 cw(c4197.01,2846.96) 4228.53,2878.48 ; D4.1@4197.01,2891.54 cw(c4197.01,2846.96) 4228.53,2878.48 ; D4.1@4197.01,2891.54 cw(c4197.01,2846.96) 4228.53,2878.48 ; D4.1@4197.01,2891.54 cw(c4197.01,2846.96) 4228.53,2878.48 ; D4.1@4197.01,2891.54 cw(c4197.01,2846.96) 4228.53,2878.48 ; U2.3@4255.18,2829.78 ccw(c4243.56,2841.4) 4260,2841.4 ; U2.3@4255.18,2829.78 ccw(c4243.56,2841.4) 4260,2841.4 ; U2.3@4255.18,2829.78 ccw(c4243.56,2841.4) 4260,2841.4 ; U2.3@4255.18,2829.78 ccw(c4243.56,2841.4) 4260,2841.4 ; U2.3@4255.18,2829.78 ccw(c4243.56,2841.4) 4260,2841.4 ; 4260,2841.4 ccw(c4276.44,2841.4) U2.3@4264.82,2829.78 ; 4260,2841.4 ccw(c4276.44,2841.4) U2.3@4264.82,2829.78 ; 4260,2841.4 ccw(c4276.44,2841.4) U2.3@4264.82,2829.78 ; 4260,2841.4 ccw(c4276.44,2841.4) U2.3@4264.82,2829.78 ; 4260,2841.4 ccw(c4276.44,2841.4) U2.3@4264.82,2829.78 ; U2.3@4264.82,2801.44 cw(c4276.44,2789.82) 4276.44,2806.26 ; U2.3@4264.82,2801.44 cw(c4276.44,2789.82) 4276.44,2806.26 ; U2.3@4264.82,2801.44 cw(c4276.44,2789.82) 4276.44,2806.26 ; U2.3@4264.82,2811.08 ccw(c4276.44,2822.7) 4276.44,2806.26 ; U2.3@4264.82,2811.08 ccw(c4276.44,2822.7) 4276.44,2806.26 ; U2.3@4264.82,2811.08 ccw(c4276.44,2822.7) 4276.44,2806.26 ; 4340.86,2769.14 cw(c4306.72,2735) v1@4355,2735 ; 4340.86,2769.14 ccw(c4375,2803.28) v1@4375,2755 ; 4340.86,2769.14 cw(c4306.72,2735) v1@4355,2735 ; 4340.86,2769.14 ccw(c4375,2803.28) v1@4375,2755 ; 4340.86,2769.14 ccw(c4375,2803.28) v1@4375,2755 ; 4340.86,2769.14 cw(c4306.72,2735) v1@4355,2735
NetD4_2: D4.2 R11.1 | length 1087.3
  Bottom Layer w10: R11.1@4225.54,2998 4225.54,2974.46 4290,2910 ; D4.2@4322.99,2910 4290,2910 ; R11.1@4218.25,2996.03 ccw(c4252.74,2996.03) 4228.35,2971.65 ; R11.1@4218.25,2996.03 ccw(c4252.74,2996.03) 4228.35,2971.65 ; R11.1@4218.25,2996.03 ccw(c4252.74,2996.03) 4228.35,2971.65 ; R11.1@4218.25,2996.03 ccw(c4252.74,2996.03) 4228.35,2971.65 ; R11.1@4218.25,2996.03 ccw(c4252.74,2996.03) 4228.35,2971.65 ; R11.1@4228.25,2996.03 ccw(c4286.88,2996.03) 4245.42,2954.58 ; R11.1@4228.25,2996.03 ccw(c4286.88,2996.03) 4245.42,2954.58 ; R11.1@4228.25,2996.03 ccw(c4286.88,2996.03) 4245.42,2954.58 ; R11.1@4228.25,2996.03 ccw(c4286.88,2996.03) 4245.42,2954.58 ; R11.1@4228.25,2996.03 ccw(c4286.88,2996.03) 4245.42,2954.58 ; R11.1@4238.25,2996.03 ccw(c4321.02,2996.03) 4262.49,2937.51 ; R11.1@4238.25,2996.03 ccw(c4321.02,2996.03) 4262.49,2937.51 ; R11.1@4238.25,2996.03 ccw(c4321.02,2996.03) 4262.49,2937.51 ; R11.1@4238.25,2996.03 ccw(c4321.02,2996.03) 4262.49,2937.51 ; R11.1@4238.25,2996.03 ccw(c4321.02,2996.03) 4262.49,2937.51 ; 4290,2910 cw(c4290,2880.28) D4.2@4312.08,2900.17 ; 4290,2910 ccw(c4290,2939.72) D4.2@4312.08,2919.83 ; 4290,2910 cw(c4290,2880.28) D4.2@4312.08,2900.17 ; 4290,2910 ccw(c4290,2939.72) D4.2@4312.08,2919.83 ; 4290,2910 ccw(c4290,2939.72) D4.2@4312.08,2919.83 ; 4290,2910 cw(c4290,2880.28) D4.2@4312.08,2900.17 ; 4290,2910 ccw(c4290,2939.72) D4.2@4312.08,2919.83 ; 4290,2910 cw(c4290,2880.28) D4.2@4312.08,2900.17 ; 4290,2910 ccw(c4290,2939.72) D4.2@4312.08,2919.83 ; 4290,2910 cw(c4290,2880.28) D4.2@4312.08,2900.17
NetD5_1: D5.1 R14.1 | length 2207.9
  Bottom Layer w10: D5.1@3500.94,2889.06 R14.1@3500.94,3020 ; R14.1@3476.64,2995.7 cw(c3417.97,2937.02) 3500.94,2937.02 ; R14.1@3476.64,2995.7 cw(c3417.97,2937.02) 3500.94,2937.02 ; R14.1@3476.64,2995.7 cw(c3417.97,2937.02) 3500.94,2937.02 ; R14.1@3476.64,2995.7 cw(c3417.97,2937.02) 3500.94,2937.02 ; R14.1@3476.64,2995.7 cw(c3417.97,2937.02) 3500.94,2937.02 ; R14.1@3483.71,3002.77 cw(c3442.11,2961.17) 3500.94,2961.17 ; R14.1@3483.71,3002.77 cw(c3442.11,2961.17) 3500.94,2961.17 ; R14.1@3483.71,3002.77 cw(c3442.11,2961.17) 3500.94,2961.17 ; R14.1@3483.71,3002.77 cw(c3442.11,2961.17) 3500.94,2961.17 ; R14.1@3483.71,3002.77 cw(c3442.11,2961.17) 3500.94,2961.17 ; D5.1@3491.26,2898.74 ccw(c3467.89,2922.11) 3500.94,2922.11 ; D5.1@3491.26,2898.74 ccw(c3467.89,2922.11) 3500.94,2922.11 ; D5.1@3491.26,2898.74 ccw(c3467.89,2922.11) 3500.94,2922.11 ; D5.1@3491.26,2898.74 ccw(c3467.89,2922.11) 3500.94,2922.11 ; D5.1@3491.26,2898.74 ccw(c3467.89,2922.11) 3500.94,2922.11 ; 3500.94,2917.54 ccw(c3547.54,2917.54) D5.1@3514.59,2884.59 ; 3500.94,2917.54 ccw(c3547.54,2917.54) D5.1@3514.59,2884.59 ; 3500.94,2917.54 ccw(c3547.54,2917.54) D5.1@3514.59,2884.59 ; 3500.94,2917.54 ccw(c3547.54,2917.54) D5.1@3514.59,2884.59 ; 3500.94,2917.54 ccw(c3547.54,2917.54) D5.1@3514.59,2884.59 ; 3500.94,2937.02 cw(c3583.92,2937.02) R14.1@3525.25,2995.7 ; 3500.94,2937.02 cw(c3583.92,2937.02) R14.1@3525.25,2995.7 ; 3500.94,2937.02 cw(c3583.92,2937.02) R14.1@3525.25,2995.7 ; 3500.94,2937.02 cw(c3583.92,2937.02) R14.1@3525.25,2995.7 ; 3500.94,2937.02 cw(c3583.92,2937.02) R14.1@3525.25,2995.7 ; 3500.94,2941.69 ccw(c3571.69,2941.69) D5.1@3521.66,2891.66 ; 3500.94,2941.69 ccw(c3571.69,2941.69) D5.1@3521.66,2891.66 ; 3500.94,2941.69 ccw(c3571.69,2941.69) D5.1@3521.66,2891.66 ; 3500.94,2941.69 ccw(c3571.69,2941.69) D5.1@3521.66,2891.66 ; 3500.94,2941.69 ccw(c3571.69,2941.69) D5.1@3521.66,2891.66 ; 3500.94,2961.17 cw(c3559.78,2961.17) R14.1@3518.18,3002.77 ; 3500.94,2961.17 cw(c3559.78,2961.17) R14.1@3518.18,3002.77 ; 3500.94,2961.17 cw(c3559.78,2961.17) R14.1@3518.18,3002.77 ; 3500.94,2961.17 cw(c3559.78,2961.17) R14.1@3518.18,3002.77 ; 3500.94,2961.17 cw(c3559.78,2961.17) R14.1@3518.18,3002.77 ; 3500.94,2965.83 ccw(c3595.83,2965.83) D5.1@3528.74,2898.74 ; 3500.94,2965.83 ccw(c3595.83,2965.83) D5.1@3528.74,2898.74 ; 3500.94,2965.83 ccw(c3595.83,2965.83) D5.1@3528.74,2898.74 ; 3500.94,2965.83 ccw(c3595.83,2965.83) D5.1@3528.74,2898.74 ; 3500.94,2965.83 ccw(c3595.83,2965.83) D5.1@3528.74,2898.74
NetD6_1: D6.1 R15.1 | length 2337
  Bottom Layer w10: D6.1@3730.94,2894.06 R15.1@3730.94,3020 ; R15.1@3706.64,2995.7 cw(c3647.97,2937.02) 3730.94,2937.02 ; R15.1@3706.64,2995.7 cw(c3647.97,2937.02) 3730.94,2937.02 ; R15.1@3706.64,2995.7 cw(c3647.97,2937.02) 3730.94,2937.02 ; R15.1@3706.64,2995.7 cw(c3647.97,2937.02) 3730.94,2937.02 ; R15.1@3706.64,2995.7 cw(c3647.97,2937.02) 3730.94,2937.02 ; R15.1@3713.71,3002.77 cw(c3672.11,2961.17) 3730.94,2961.17 ; R15.1@3713.71,3002.77 cw(c3672.11,2961.17) 3730.94,2961.17 ; R15.1@3713.71,3002.77 cw(c3672.11,2961.17) 3730.94,2961.17 ; R15.1@3713.71,3002.77 cw(c3672.11,2961.17) 3730.94,2961.17 ; R15.1@3713.71,3002.77 cw(c3672.11,2961.17) 3730.94,2961.17 ; D6.1@3726.26,2898.74 ccw(c3714.97,2910.03) D6.1@3730.94,2910.03 ; D6.1@3726.26,2898.74 ccw(c3714.97,2910.03) D6.1@3730.94,2910.03 ; D6.1@3726.26,2898.74 ccw(c3714.97,2910.03) D6.1@3730.94,2910.03 ; D6.1@3726.26,2898.74 ccw(c3714.97,2910.03) D6.1@3730.94,2910.03 ; D6.1@3726.26,2898.74 ccw(c3714.97,2910.03) D6.1@3730.94,2910.03 ; 3730.94,2929.61 ccw(c3794.61,2929.61) D6.1@3749.59,2884.59 ; 3730.94,2929.61 ccw(c3794.61,2929.61) D6.1@3749.59,2884.59 ; 3730.94,2929.61 ccw(c3794.61,2929.61) D6.1@3749.59,2884.59 ; 3730.94,2929.61 ccw(c3794.61,2929.61) D6.1@3749.59,2884.59 ; 3730.94,2929.61 ccw(c3794.61,2929.61) D6.1@3749.59,2884.59 ; 3730.94,2937.02 cw(c3813.92,2937.02) R15.1@3755.25,2995.7 ; 3730.94,2937.02 cw(c3813.92,2937.02) R15.1@3755.25,2995.7 ; 3730.94,2937.02 cw(c3813.92,2937.02) R15.1@3755.25,2995.7 ; 3730.94,2937.02 cw(c3813.92,2937.02) R15.1@3755.25,2995.7 ; 3730.94,2937.02 cw(c3813.92,2937.02) R15.1@3755.25,2995.7 ; 3730.94,2953.76 ccw(c3818.76,2953.76) D6.1@3756.66,2891.66 ; 3730.94,2953.76 ccw(c3818.76,2953.76) D6.1@3756.66,2891.66 ; 3730.94,2953.76 ccw(c3818.76,2953.76) D6.1@3756.66,2891.66 ; 3730.94,2953.76 ccw(c3818.76,2953.76) D6.1@3756.66,2891.66 ; 3730.94,2953.76 ccw(c3818.76,2953.76) D6.1@3756.66,2891.66 ; 3730.94,2961.17 cw(c3789.78,2961.17) R15.1@3748.18,3002.77 ; 3730.94,2961.17 cw(c3789.78,2961.17) R15.1@3748.18,3002.77 ; 3730.94,2961.17 cw(c3789.78,2961.17) R15.1@3748.18,3002.77 ; 3730.94,2961.17 cw(c3789.78,2961.17) R15.1@3748.18,3002.77 ; 3730.94,2961.17 cw(c3789.78,2961.17) R15.1@3748.18,3002.77 ; 3730.94,2977.9 ccw(c3842.9,2977.9) D6.1@3763.74,2898.74 ; 3730.94,2977.9 ccw(c3842.9,2977.9) D6.1@3763.74,2898.74 ; 3730.94,2977.9 ccw(c3842.9,2977.9) D6.1@3763.74,2898.74 ; 3730.94,2977.9 ccw(c3842.9,2977.9) D6.1@3763.74,2898.74 ; 3730.94,2977.9 ccw(c3842.9,2977.9) D6.1@3763.74,2898.74
NetD7_1: D7.1 R16.1 | length 2207.9
  Bottom Layer w10: D7.1@3960.94,2889.06 R16.1@3960.94,3020 ; R16.1@3936.64,2995.7 cw(c3877.97,2937.02) 3960.94,2937.02 ; R16.1@3936.64,2995.7 cw(c3877.97,2937.02) 3960.94,2937.02 ; R16.1@3936.64,2995.7 cw(c3877.97,2937.02) 3960.94,2937.02 ; R16.1@3936.64,2995.7 cw(c3877.97,2937.02) 3960.94,2937.02 ; R16.1@3936.64,2995.7 cw(c3877.97,2937.02) 3960.94,2937.02 ; R16.1@3943.71,3002.77 cw(c3902.11,2961.17) 3960.94,2961.17 ; R16.1@3943.71,3002.77 cw(c3902.11,2961.17) 3960.94,2961.17 ; R16.1@3943.71,3002.77 cw(c3902.11,2961.17) 3960.94,2961.17 ; R16.1@3943.71,3002.77 cw(c3902.11,2961.17) 3960.94,2961.17 ; R16.1@3943.71,3002.77 cw(c3902.11,2961.17) 3960.94,2961.17 ; D7.1@3951.26,2898.74 ccw(c3927.89,2922.11) 3960.94,2922.11 ; D7.1@3951.26,2898.74 ccw(c3927.89,2922.11) 3960.94,2922.11 ; D7.1@3951.26,2898.74 ccw(c3927.89,2922.11) 3960.94,2922.11 ; D7.1@3951.26,2898.74 ccw(c3927.89,2922.11) 3960.94,2922.11 ; D7.1@3951.26,2898.74 ccw(c3927.89,2922.11) 3960.94,2922.11 ; 3960.94,2917.54 ccw(c4007.54,2917.54) D7.1@3974.59,2884.59 ; 3960.94,2917.54 ccw(c4007.54,2917.54) D7.1@3974.59,2884.59 ; 3960.94,2917.54 ccw(c4007.54,2917.54) D7.1@3974.59,2884.59 ; 3960.94,2917.54 ccw(c4007.54,2917.54) D7.1@3974.59,2884.59 ; 3960.94,2917.54 ccw(c4007.54,2917.54) D7.1@3974.59,2884.59 ; 3960.94,2937.02 cw(c4043.92,2937.02) R16.1@3985.25,2995.7 ; 3960.94,2937.02 cw(c4043.92,2937.02) R16.1@3985.25,2995.7 ; 3960.94,2937.02 cw(c4043.92,2937.02) R16.1@3985.25,2995.7 ; 3960.94,2937.02 cw(c4043.92,2937.02) R16.1@3985.25,2995.7 ; 3960.94,2937.02 cw(c4043.92,2937.02) R16.1@3985.25,2995.7 ; 3960.94,2941.69 ccw(c4031.69,2941.69) D7.1@3981.66,2891.66 ; 3960.94,2941.69 ccw(c4031.69,2941.69) D7.1@3981.66,2891.66 ; 3960.94,2941.69 ccw(c4031.69,2941.69) D7.1@3981.66,2891.66 ; 3960.94,2941.69 ccw(c4031.69,2941.69) D7.1@3981.66,2891.66 ; 3960.94,2941.69 ccw(c4031.69,2941.69) D7.1@3981.66,2891.66 ; 3960.94,2961.17 cw(c4019.78,2961.17) R16.1@3978.18,3002.77 ; 3960.94,2961.17 cw(c4019.78,2961.17) R16.1@3978.18,3002.77 ; 3960.94,2961.17 cw(c4019.78,2961.17) R16.1@3978.18,3002.77 ; 3960.94,2961.17 cw(c4019.78,2961.17) R16.1@3978.18,3002.77 ; 3960.94,2961.17 cw(c4019.78,2961.17) R16.1@3978.18,3002.77 ; 3960.94,2965.83 ccw(c4055.83,2965.83) D7.1@3988.74,2898.74 ; 3960.94,2965.83 ccw(c4055.83,2965.83) D7.1@3988.74,2898.74 ; 3960.94,2965.83 ccw(c4055.83,2965.83) D7.1@3988.74,2898.74 ; 3960.94,2965.83 ccw(c4055.83,2965.83) D7.1@3988.74,2898.74 ; 3960.94,2965.83 ccw(c4055.83,2965.83) D7.1@3988.74,2898.74
NetD8_1: D8.1 R18.1 | length 2342
  Bottom Layer w10: D8.1@3500.94,2529.06 R18.1@3500.94,2660 ; R18.1@3476.64,2635.7 cw(c3417.97,2577.02) 3500.94,2577.02 ; R18.1@3476.64,2635.7 cw(c3417.97,2577.02) 3500.94,2577.02 ; R18.1@3476.64,2635.7 cw(c3417.97,2577.02) 3500.94,2577.02 ; R18.1@3476.64,2635.7 cw(c3417.97,2577.02) 3500.94,2577.02 ; R18.1@3476.64,2635.7 cw(c3417.97,2577.02) 3500.94,2577.02 ; R18.1@3483.71,2642.77 cw(c3442.11,2601.17) 3500.94,2601.17 ; R18.1@3483.71,2642.77 cw(c3442.11,2601.17) 3500.94,2601.17 ; R18.1@3483.71,2642.77 cw(c3442.11,2601.17) 3500.94,2601.17 ; R18.1@3483.71,2642.77 cw(c3442.11,2601.17) 3500.94,2601.17 ; R18.1@3483.71,2642.77 cw(c3442.11,2601.17) 3500.94,2601.17 ; D8.1@3496.26,2533.74 ccw(c3484.97,2545.03) D8.1@3500.94,2545.03 ; D8.1@3496.26,2533.74 ccw(c3484.97,2545.03) D8.1@3500.94,2545.03 ; D8.1@3496.26,2533.74 ccw(c3484.97,2545.03) D8.1@3500.94,2545.03 ; D8.1@3496.26,2533.74 ccw(c3484.97,2545.03) D8.1@3500.94,2545.03 ; D8.1@3496.26,2533.74 ccw(c3484.97,2545.03) D8.1@3500.94,2545.03 ; 3500.94,2564.61 ccw(c3564.61,2564.61) D8.1@3519.59,2519.59 ; 3500.94,2564.61 ccw(c3564.61,2564.61) D8.1@3519.59,2519.59 ; 3500.94,2564.61 ccw(c3564.61,2564.61) D8.1@3519.59,2519.59 ; 3500.94,2564.61 ccw(c3564.61,2564.61) D8.1@3519.59,2519.59 ; 3500.94,2564.61 ccw(c3564.61,2564.61) D8.1@3519.59,2519.59 ; 3500.94,2577.02 cw(c3583.92,2577.02) R18.1@3525.25,2635.7 ; 3500.94,2577.02 cw(c3583.92,2577.02) R18.1@3525.25,2635.7 ; 3500.94,2577.02 cw(c3583.92,2577.02) R18.1@3525.25,2635.7 ; 3500.94,2577.02 cw(c3583.92,2577.02) R18.1@3525.25,2635.7 ; 3500.94,2577.02 cw(c3583.92,2577.02) R18.1@3525.25,2635.7 ; 3500.94,2588.76 ccw(c3588.76,2588.76) D8.1@3526.66,2526.66 ; 3500.94,2588.76 ccw(c3588.76,2588.76) D8.1@3526.66,2526.66 ; 3500.94,2588.76 ccw(c3588.76,2588.76) D8.1@3526.66,2526.66 ; 3500.94,2588.76 ccw(c3588.76,2588.76) D8.1@3526.66,2526.66 ; 3500.94,2588.76 ccw(c3588.76,2588.76) D8.1@3526.66,2526.66 ; 3500.94,2601.17 cw(c3559.78,2601.17) R18.1@3518.18,2642.77 ; 3500.94,2601.17 cw(c3559.78,2601.17) R18.1@3518.18,2642.77 ; 3500.94,2601.17 cw(c3559.78,2601.17) R18.1@3518.18,2642.77 ; 3500.94,2601.17 cw(c3559.78,2601.17) R18.1@3518.18,2642.77 ; 3500.94,2601.17 cw(c3559.78,2601.17) R18.1@3518.18,2642.77 ; 3500.94,2612.9 ccw(c3612.9,2612.9) D8.1@3533.74,2533.74 ; 3500.94,2612.9 ccw(c3612.9,2612.9) D8.1@3533.74,2533.74 ; 3500.94,2612.9 ccw(c3612.9,2612.9) D8.1@3533.74,2533.74 ; 3500.94,2612.9 ccw(c3612.9,2612.9) D8.1@3533.74,2533.74 ; 3500.94,2612.9 ccw(c3612.9,2612.9) D8.1@3533.74,2533.74
NetD9_1: D9.1 R19.1 | length 2342
  Bottom Layer w10: D9.1@3730.94,2529.06 R19.1@3730.94,2660 ; R19.1@3706.64,2635.7 cw(c3647.97,2577.02) 3730.94,2577.02 ; R19.1@3706.64,2635.7 cw(c3647.97,2577.02) 3730.94,2577.02 ; R19.1@3706.64,2635.7 cw(c3647.97,2577.02) 3730.94,2577.02 ; R19.1@3706.64,2635.7 cw(c3647.97,2577.02) 3730.94,2577.02 ; R19.1@3706.64,2635.7 cw(c3647.97,2577.02) 3730.94,2577.02 ; R19.1@3713.71,2642.77 cw(c3672.11,2601.17) 3730.94,2601.17 ; R19.1@3713.71,2642.77 cw(c3672.11,2601.17) 3730.94,2601.17 ; R19.1@3713.71,2642.77 cw(c3672.11,2601.17) 3730.94,2601.17 ; R19.1@3713.71,2642.77 cw(c3672.11,2601.17) 3730.94,2601.17 ; R19.1@3713.71,2642.77 cw(c3672.11,2601.17) 3730.94,2601.17 ; D9.1@3726.26,2533.74 ccw(c3714.97,2545.03) D9.1@3730.94,2545.03 ; D9.1@3726.26,2533.74 ccw(c3714.97,2545.03) D9.1@3730.94,2545.03 ; D9.1@3726.26,2533.74 ccw(c3714.97,2545.03) D9.1@3730.94,2545.03 ; D9.1@3726.26,2533.74 ccw(c3714.97,2545.03) D9.1@3730.94,2545.03 ; D9.1@3726.26,2533.74 ccw(c3714.97,2545.03) D9.1@3730.94,2545.03 ; 3730.94,2564.61 ccw(c3794.61,2564.61) D9.1@3749.59,2519.59 ; 3730.94,2564.61 ccw(c3794.61,2564.61) D9.1@3749.59,2519.59 ; 3730.94,2564.61 ccw(c3794.61,2564.61) D9.1@3749.59,2519.59 ; 3730.94,2564.61 ccw(c3794.61,2564.61) D9.1@3749.59,2519.59 ; 3730.94,2564.61 ccw(c3794.61,2564.61) D9.1@3749.59,2519.59 ; 3730.94,2577.02 cw(c3813.92,2577.02) R19.1@3755.25,2635.7 ; 3730.94,2577.02 cw(c3813.92,2577.02) R19.1@3755.25,2635.7 ; 3730.94,2577.02 cw(c3813.92,2577.02) R19.1@3755.25,2635.7 ; 3730.94,2577.02 cw(c3813.92,2577.02) R19.1@3755.25,2635.7 ; 3730.94,2577.02 cw(c3813.92,2577.02) R19.1@3755.25,2635.7 ; 3730.94,2588.76 ccw(c3818.76,2588.76) D9.1@3756.66,2526.66 ; 3730.94,2588.76 ccw(c3818.76,2588.76) D9.1@3756.66,2526.66 ; 3730.94,2588.76 ccw(c3818.76,2588.76) D9.1@3756.66,2526.66 ; 3730.94,2588.76 ccw(c3818.76,2588.76) D9.1@3756.66,2526.66 ; 3730.94,2588.76 ccw(c3818.76,2588.76) D9.1@3756.66,2526.66 ; 3730.94,2601.17 cw(c3789.78,2601.17) R19.1@3748.18,2642.77 ; 3730.94,2601.17 cw(c3789.78,2601.17) R19.1@3748.18,2642.77 ; 3730.94,2601.17 cw(c3789.78,2601.17) R19.1@3748.18,2642.77 ; 3730.94,2601.17 cw(c3789.78,2601.17) R19.1@3748.18,2642.77 ; 3730.94,2601.17 cw(c3789.78,2601.17) R19.1@3748.18,2642.77 ; 3730.94,2612.9 ccw(c3842.9,2612.9) D9.1@3763.74,2533.74 ; 3730.94,2612.9 ccw(c3842.9,2612.9) D9.1@3763.74,2533.74 ; 3730.94,2612.9 ccw(c3842.9,2612.9) D9.1@3763.74,2533.74 ; 3730.94,2612.9 ccw(c3842.9,2612.9) D9.1@3763.74,2533.74 ; 3730.94,2612.9 ccw(c3842.9,2612.9) D9.1@3763.74,2533.74
NetD10_1: D10.1 R20.1 | length 2342
  Bottom Layer w10: D10.1@3960.94,2529.06 R20.1@3960.94,2660 ; R20.1@3936.64,2635.7 cw(c3877.97,2577.02) 3960.94,2577.02 ; R20.1@3936.64,2635.7 cw(c3877.97,2577.02) 3960.94,2577.02 ; R20.1@3936.64,2635.7 cw(c3877.97,2577.02) 3960.94,2577.02 ; R20.1@3936.64,2635.7 cw(c3877.97,2577.02) 3960.94,2577.02 ; R20.1@3936.64,2635.7 cw(c3877.97,2577.02) 3960.94,2577.02 ; R20.1@3943.71,2642.77 cw(c3902.11,2601.17) 3960.94,2601.17 ; R20.1@3943.71,2642.77 cw(c3902.11,2601.17) 3960.94,2601.17 ; R20.1@3943.71,2642.77 cw(c3902.11,2601.17) 3960.94,2601.17 ; R20.1@3943.71,2642.77 cw(c3902.11,2601.17) 3960.94,2601.17 ; R20.1@3943.71,2642.77 cw(c3902.11,2601.17) 3960.94,2601.17 ; D10.1@3956.26,2533.74 ccw(c3944.97,2545.03) D10.1@3960.94,2545.03 ; D10.1@3956.26,2533.74 ccw(c3944.97,2545.03) D10.1@3960.94,2545.03 ; D10.1@3956.26,2533.74 ccw(c3944.97,2545.03) D10.1@3960.94,2545.03 ; D10.1@3956.26,2533.74 ccw(c3944.97,2545.03) D10.1@3960.94,2545.03 ; D10.1@3956.26,2533.74 ccw(c3944.97,2545.03) D10.1@3960.94,2545.03 ; 3960.94,2564.61 ccw(c4024.61,2564.61) D10.1@3979.59,2519.59 ; 3960.94,2564.61 ccw(c4024.61,2564.61) D10.1@3979.59,2519.59 ; 3960.94,2564.61 ccw(c4024.61,2564.61) D10.1@3979.59,2519.59 ; 3960.94,2564.61 ccw(c4024.61,2564.61) D10.1@3979.59,2519.59 ; 3960.94,2564.61 ccw(c4024.61,2564.61) D10.1@3979.59,2519.59 ; 3960.94,2577.02 cw(c4043.92,2577.02) R20.1@3985.25,2635.7 ; 3960.94,2577.02 cw(c4043.92,2577.02) R20.1@3985.25,2635.7 ; 3960.94,2577.02 cw(c4043.92,2577.02) R20.1@3985.25,2635.7 ; 3960.94,2577.02 cw(c4043.92,2577.02) R20.1@3985.25,2635.7 ; 3960.94,2577.02 cw(c4043.92,2577.02) R20.1@3985.25,2635.7 ; 3960.94,2588.76 ccw(c4048.76,2588.76) D10.1@3986.66,2526.66 ; 3960.94,2588.76 ccw(c4048.76,2588.76) D10.1@3986.66,2526.66 ; 3960.94,2588.76 ccw(c4048.76,2588.76) D10.1@3986.66,2526.66 ; 3960.94,2588.76 ccw(c4048.76,2588.76) D10.1@3986.66,2526.66 ; 3960.94,2588.76 ccw(c4048.76,2588.76) D10.1@3986.66,2526.66 ; 3960.94,2601.17 cw(c4019.78,2601.17) R20.1@3978.18,2642.77 ; 3960.94,2601.17 cw(c4019.78,2601.17) R20.1@3978.18,2642.77 ; 3960.94,2601.17 cw(c4019.78,2601.17) R20.1@3978.18,2642.77 ; 3960.94,2601.17 cw(c4019.78,2601.17) R20.1@3978.18,2642.77 ; 3960.94,2601.17 cw(c4019.78,2601.17) R20.1@3978.18,2642.77 ; 3960.94,2612.9 ccw(c4072.9,2612.9) D10.1@3993.74,2533.74 ; 3960.94,2612.9 ccw(c4072.9,2612.9) D10.1@3993.74,2533.74 ; 3960.94,2612.9 ccw(c4072.9,2612.9) D10.1@3993.74,2533.74 ; 3960.94,2612.9 ccw(c4072.9,2612.9) D10.1@3993.74,2533.74 ; 3960.94,2612.9 ccw(c4072.9,2612.9) D10.1@3993.74,2533.74
NetR13_1: R13.1 U2.1 | length 423.9
  Bottom Layer w10: R13.1@4294.46,2632 U2.1@4294.46,2710.8 ; R13.1@4285.47,2642.96 ccw(c4263.76,2664.67) 4294.46,2664.67 ; R13.1@4285.47,2642.96 ccw(c4263.76,2664.67) 4294.46,2664.67 ; R13.1@4285.47,2642.96 ccw(c4263.76,2664.67) 4294.46,2664.67 ; R13.1@4285.47,2642.96 ccw(c4263.76,2664.67) 4294.46,2664.67 ; R13.1@4285.47,2642.96 ccw(c4263.76,2664.67) 4294.46,2664.67 ; 4294.46,2664.67 ccw(c4325.16,2664.67) R13.1@4303.46,2642.96 ; 4294.46,2664.67 ccw(c4325.16,2664.67) R13.1@4303.46,2642.96 ; 4294.46,2664.67 ccw(c4325.16,2664.67) R13.1@4303.46,2642.96 ; 4294.46,2664.67 ccw(c4325.16,2664.67) R13.1@4303.46,2642.96 ; 4294.46,2664.67 ccw(c4325.16,2664.67) R13.1@4303.46,2642.96 ; 4294.46,2671.5 cw(c4320.94,2671.5) U2.1@4302.22,2690.22 ; 4294.46,2671.5 cw(c4320.94,2671.5) U2.1@4302.22,2690.22 ; 4294.46,2671.5 cw(c4320.94,2671.5) U2.1@4302.22,2690.22 ; 4294.46,2671.5 cw(c4320.94,2671.5) U2.1@4302.22,2690.22 ; 4294.46,2671.5 cw(c4320.94,2671.5) U2.1@4302.22,2690.22